# EAGLE board Tremendous Migelo-Elzing (EAGLE 7.6.0)

Size 73.58 x 215.79 mm. Coordinates in mm from the lower left corner, seen from the top.
Outline: 0,0 56.82,0 56.82,53.33 0,53.33 0,0
Copper layers (1*16): Top 0.035mm / dielectric 1.5mm / Bottom 0.035mm
Design rules "default": minimum track width 10mil, minimum drill 24mil, track to track 8mil, track to pad 8mil, pad to pad 8mil, via to via 8mil, smd to smd 8mil, copper to edge 40mil, drill to drill 8mil, minimum pad ring 10mil, minimum via ring 8mil, stop-mask expansion 4mil, vias tented up to drill 0mil, thermal gap 10mil

## Footprints (pad centres in the part's own frame; a part is rotated, then mirrored left to right if it is on the bottom)
LED5MM = drill 0.813 octagon: A -1.27,0; K 1.27,0
0207/10 = drill 0.813 octagon: 1 -5.08,0; 2 5.08,0
DIP04YL = drill 0.813 long: 1 -3.81,-3.81; 2 -1.27,-3.81; 3 1.27,-3.81; 4 3.81,-3.81; 5 3.81,3.81; 6 1.27,3.81; 7 -1.27,3.81; 8 -3.81,3.81
DIL14 = drill 0.813 long: 1 -7.62,-3.81; 2 -5.08,-3.81; 3 -2.54,-3.81; 4 0,-3.81; 5 2.54,-3.81; 6 5.08,-3.81; 7 7.62,-3.81; 8 7.62,3.81; 9 5.08,3.81; 10 2.54,3.81; 11 0,3.81; 12 -2.54,3.81; 13 -5.08,3.81; 14 -7.62,3.81
ARDUINO_UNO = drill 1.016 pad 1.88: 0 63.5,50.8; 1 60.96,50.8; 2 58.42,50.8; 3 55.88,50.8; 3.3V 35.56,2.54; 4 53.34,50.8; 5 50.8,50.8; 5V 38.1,2.54; 6 48.26,50.8; 7 45.72,50.8; 8 41.656,50.8; 9 39.116,50.8; 10 36.576,50.8; 11 34.036,50.8; 12 31.496,50.8; 13 28.956,50.8; A0 50.8,2.54; A1 53.34,2.54; A2 55.88,2.54; A3 58.42,2.54; A4 60.96,2.54; A5 63.5,2.54; AREF 23.876,50.8; GND 26.416,50.8; GND. 43.18,2.54; GND.. 40.64,2.54; I/OREF 30.48,2.54; N/C 27.94,2.54; RESET 33.02,2.54; SCL 18.796,50.8; SDA 21.336,50.8; VIN 45.72,2.54 | hole 3.2: 66.04,7.62; 66.04,35.56; 15.24,50.8; 13.97,2.54

## Placement (x,y rotation side)
D1  [LED5MM]  5,137.08 0 top
D3  [LED5MM]  5,149.78 0 top
R1  221k‎Ω  [0207/10]  5,60.88 0 top
R2  221k‎Ω  [0207/10]  5,73.58 0 top
R3  221k‎Ω  [0207/10]  5,86.28 0 top
R4  221k‎Ω  [0207/10]  5,98.98 0 top
R5  221k‎Ω  [0207/10]  5,111.68 0 top
R6  221k‎Ω  [0207/10]  5,124.38 0 top
SW1  [DIP04YL]  5,10.08 0 top
U1  [DIL14]  5,22.78 0 top
U2  [DIL14]  5,35.48 0 top
U4  [DIL14]  5,48.18 0 top
U5  [ARDUINO_UNO]  5,162.48 0 top

## Library data of the parts
D1 D3 R1-R6 SW1 U1 U2 U4 U5 = AUTODESK_CIRCUITS_BREADBOARD

## Nets
N$1: R4.1 SW1.5 U1.1
N$2: R3.1 SW1.6 U1.2
N$3: U1.13
N$4: U1.10
N$5: U1.8
N$6: U1.12
N$7: U1.9
N$8: U1.11
N$9: D3.A R6.1 R6.2 U1.5 U2.5
N$10: U1.3 U1.4
N$11: U2.3 U4.3 U4.5
N$12: U2.13
N$13: U2.6
N$14: U2.9
N$15: U2.12
N$16: U2.8
N$17: U2.10
N$18: R1.2 R2.2 R3.2 R4.2 U1.14 U2.1 U2.4 U2.14 U4.14 U5.5V
N$19: U2.11
N$20: U4.13
N$21: R1.1 SW1.8 U4.4
N$22: U4.9
N$23: R2.1 SW1.7 U4.1
N$24: U4.8
N$25: U4.10
N$26: U4.2 U4.6
N$27: U4.11
N$28: D1.A R5.1 R5.2 U1.6 U2.2
N$29: U4.12
N$30: D1.K D3.K SW1.1 SW1.2 SW1.3 SW1.4 U1.7 U2.7 U4.7 U5.GND.

## Tracks (layer width: path | path; a pad name or v marks a point on that pad's centre or on a via)
N$1  (2 unrouted)
N$2  (2 unrouted)
N$9  (4 unrouted)
N$10  (1 unrouted)
N$11  (2 unrouted)
N$18  (9 unrouted)
N$21  (2 unrouted)
N$23  (2 unrouted)
N$26  (1 unrouted)
N$28  (4 unrouted)
N$30  (9 unrouted)